# Altium PCB Lab11.PcbDoc
Units mm, origin at the board's own origin, x right, y up, seen from the top; angles counter-clockwise.
Board outline 80 x 35 mm, 4 copper layers (Top Layer, GND, PWR, Bottom Layer), stack 0.603 mm thick; 16 components, 11 nets, 48 pads, 0 vias.
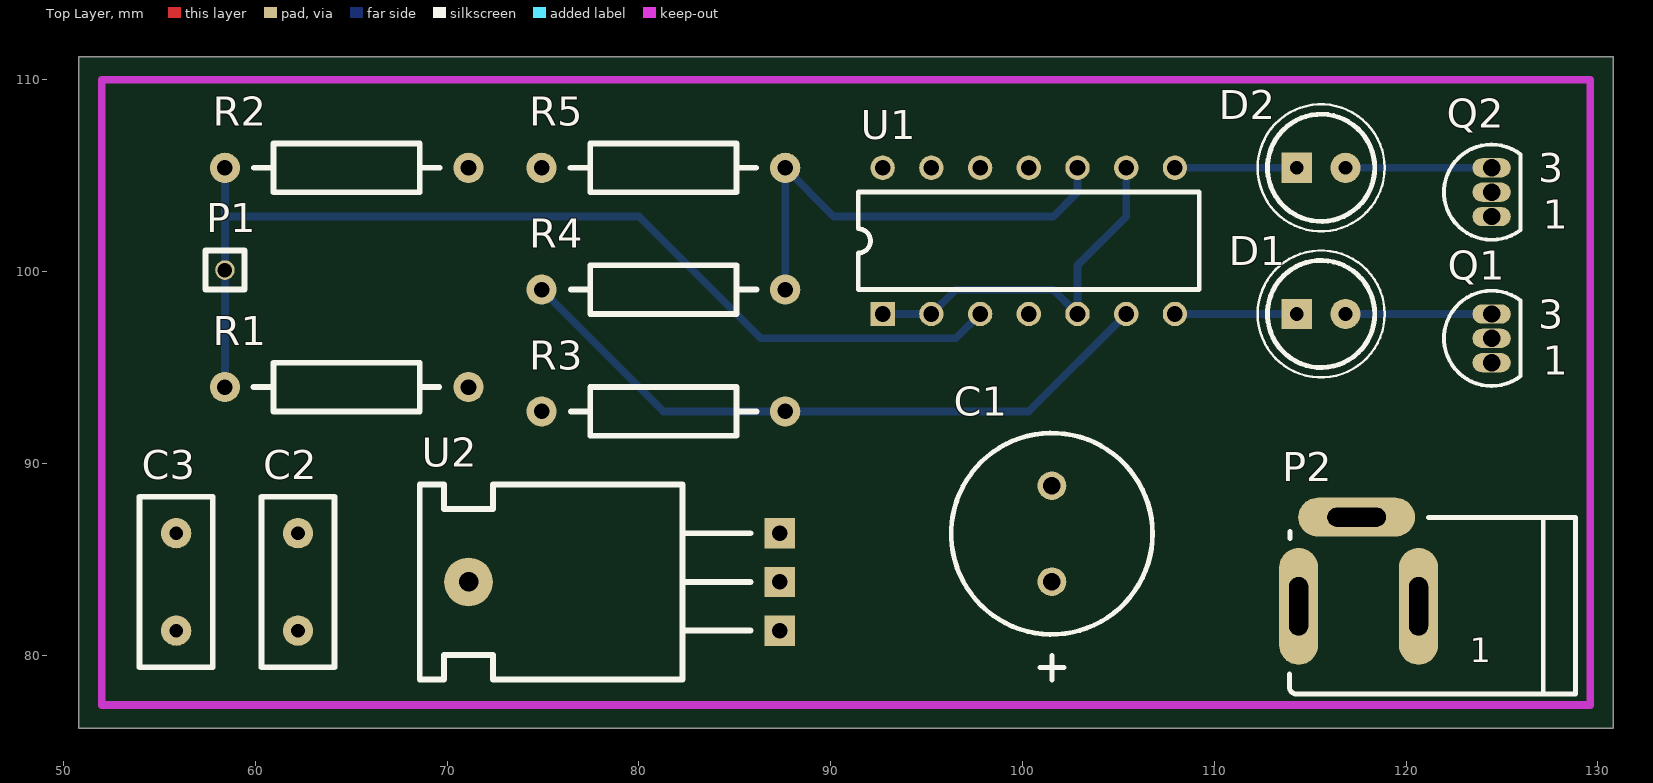
[diagram p0: Top Layer view]
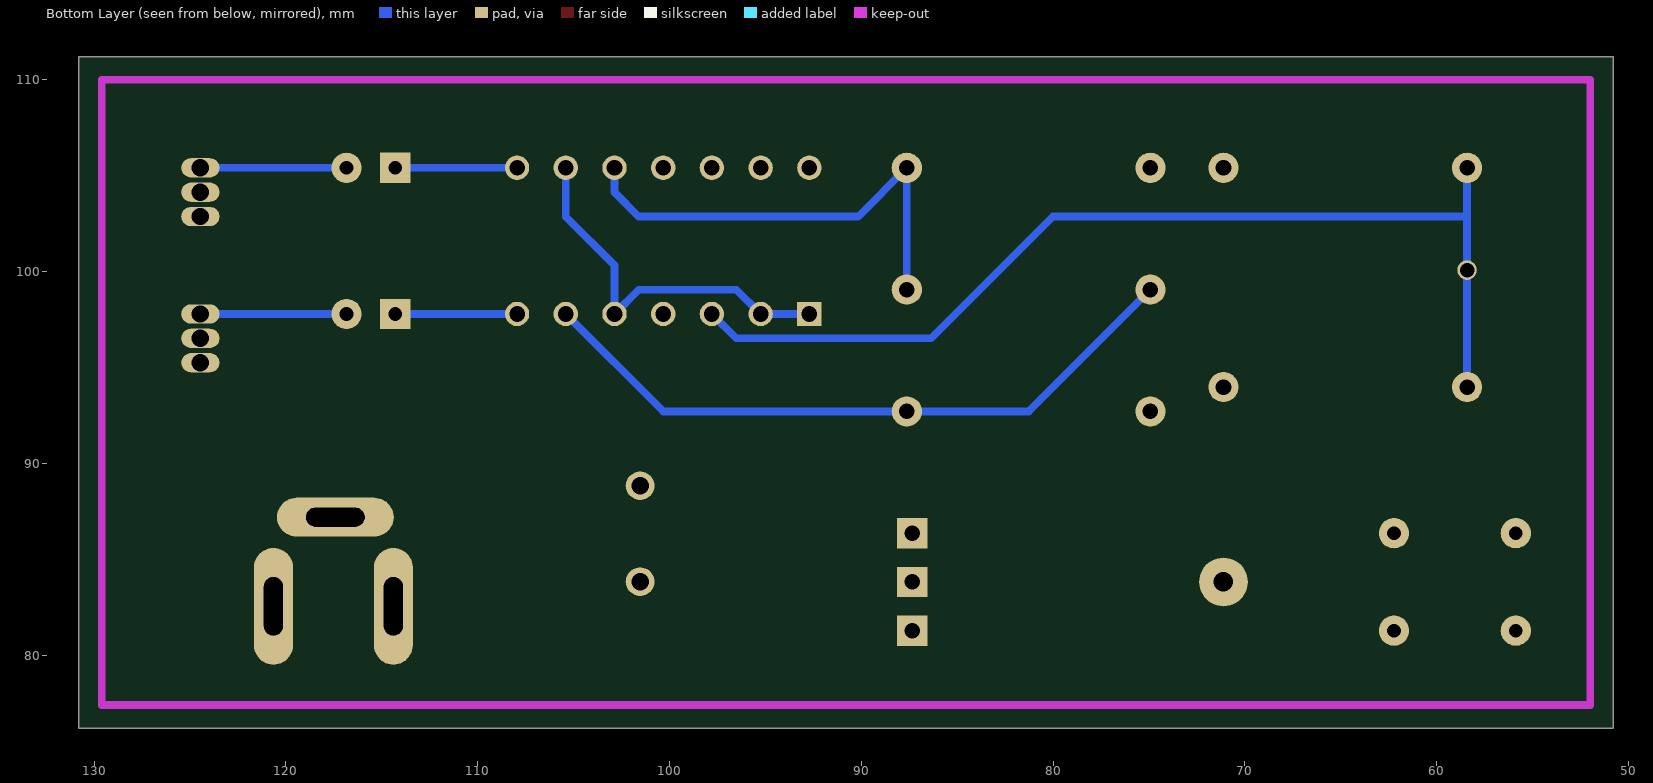
[diagram p1: Bottom Layer view, seen from below]
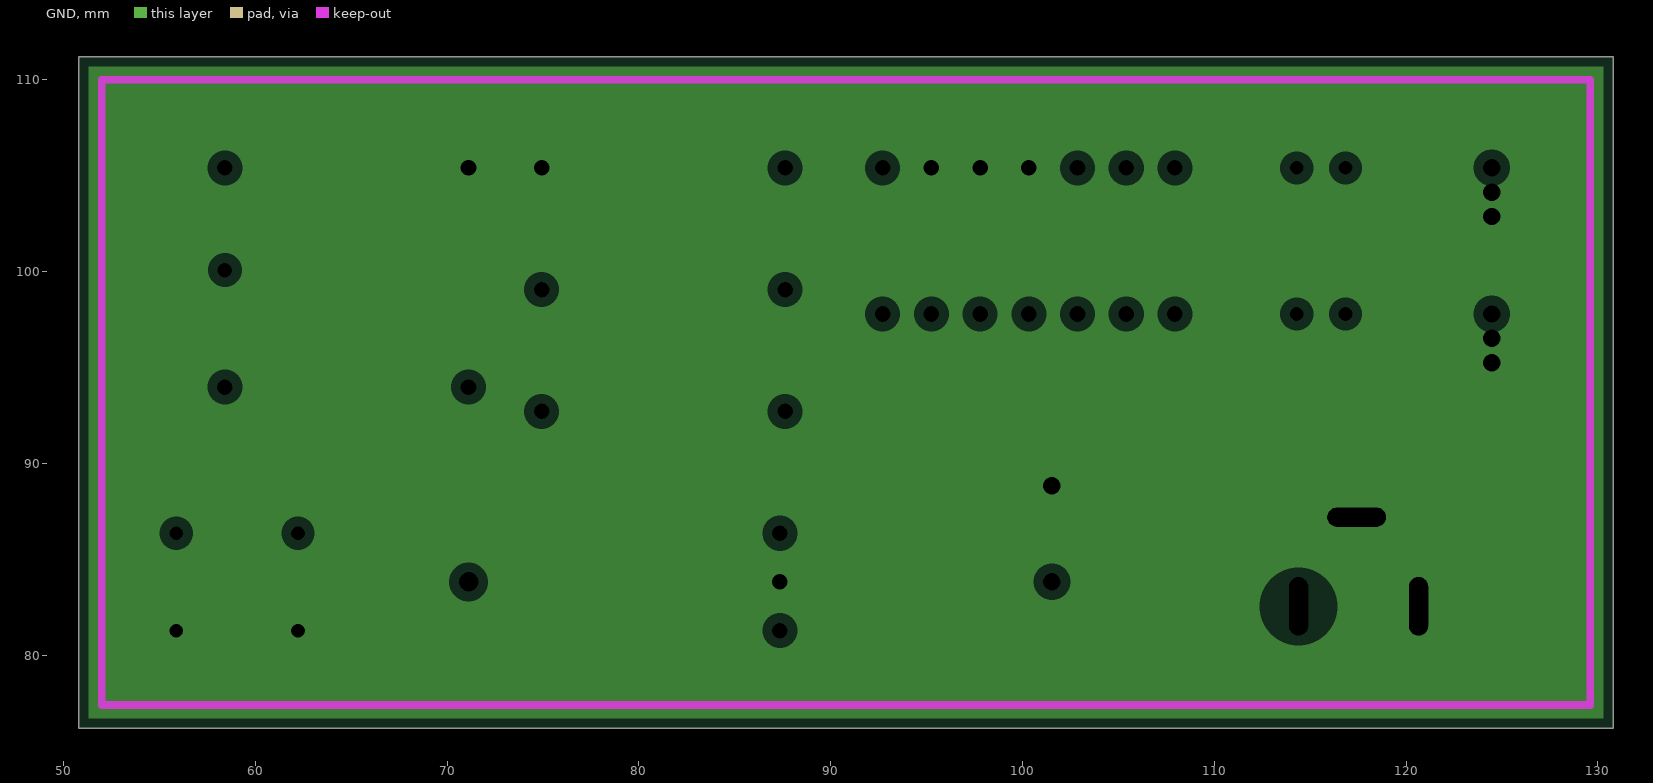
[diagram p2: GND, clearances drawn from the general rule]
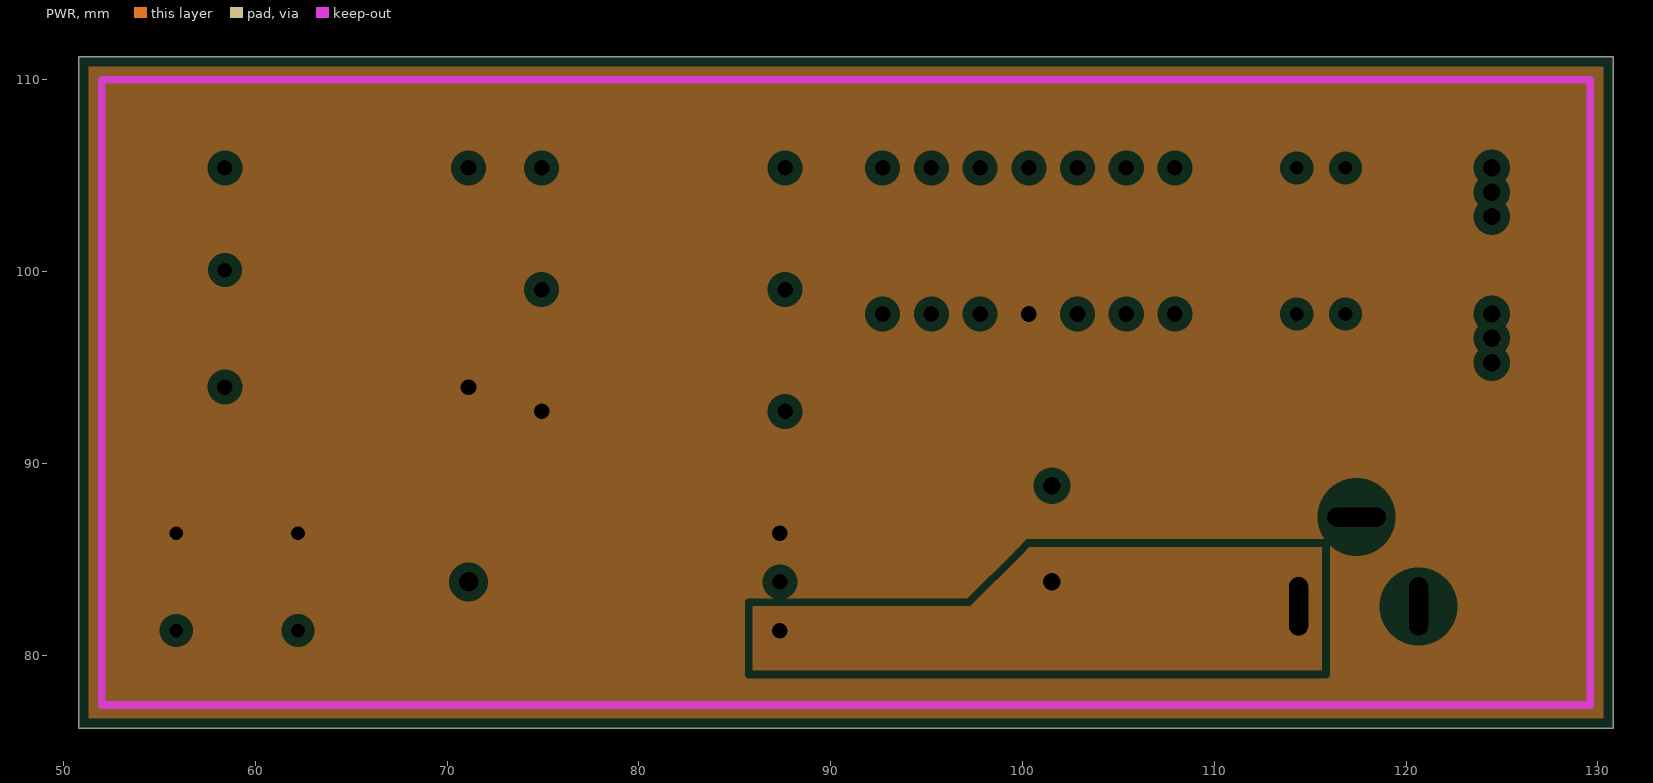
[diagram p3: PWR, clearances drawn from the general rule]
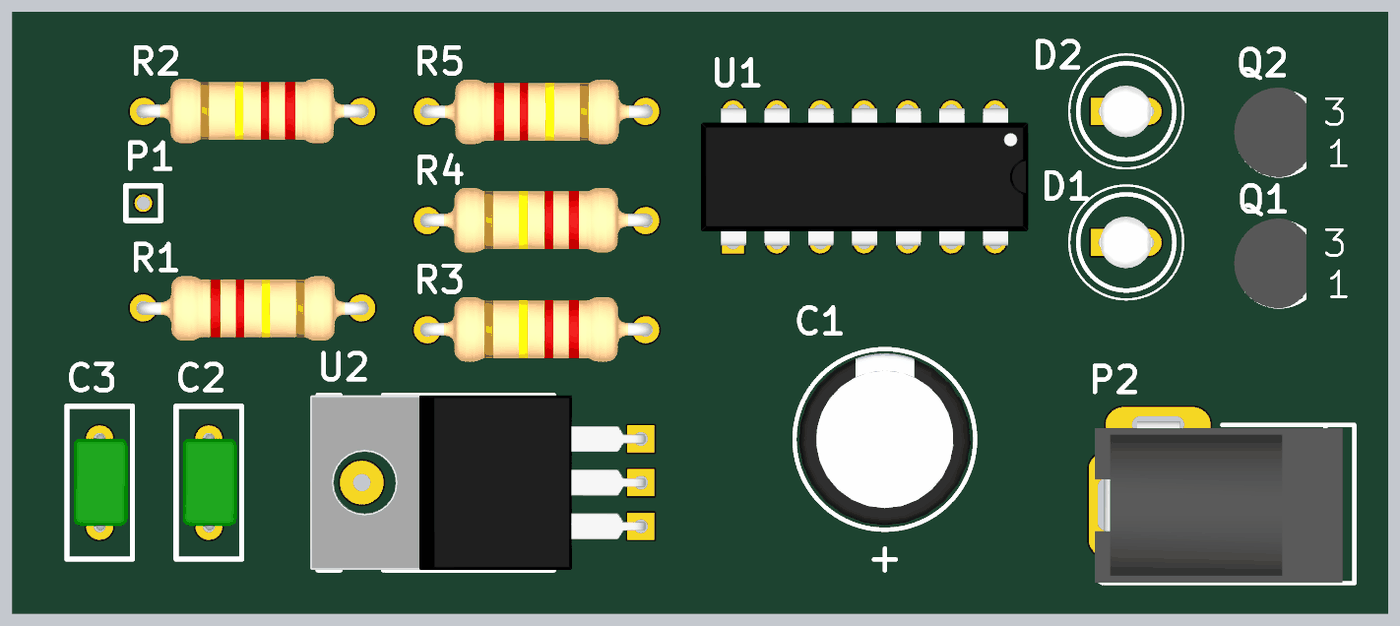
[diagram p4: 3D render of the assembled board from above, using the file's embedded part models]

## Layer stack, top to bottom
Top Solder: solder mask 0.0102, Solder Resist, Dk 3.5
Top Layer: signal copper 0.0356
Dielectric 2: prepreg 0.0711, PP-006, Dk 4.1
GND: plane copper 0.035, net GND
Dielectric 1: dielectric 0.32, FR-4, Dk 4.8
PWR: plane copper 0.035, net +5V
Dielectric 3: prepreg 0.0711, PP-006, Dk 4.1
Bottom Layer: signal copper 0.0356
Bottom Solder: solder mask 0.0102, Solder Resist, Dk 3.5

## Board outline
50.8,76.2 130.8,76.2 130.8,111.2 50.8,111.2

## Design rules (kind name [scope] priority, off if disabled: settings)
Clearance Clearance_1 [All] p1: gap=0.4 ignorepadtopadclearanceinfootprint=TRUE
Clearance Clearance_2 [OnMid vs OnMid] p2: gap=0.254 ignorepadtopadclearanceinfootprint=TRUE
Clearance Clearance_3 [(ExistsOnLayer('Top Layer') Or ExistsOnLayer('Bottom Layer')) vs (ExistsOnLayer('Top Layer') Or ExistsOnLayer('Bottom Layer'))] p3: gap=0.254 ignorepadtopadclearanceinfootprint=TRUE
Clearance [All] p4: gap=0.254 ignorepadtopadclearanceinfootprint=TRUE
HoleSize [All] p1: absolutevalues=TRUE maxlimit=3.5 minlimit=0.9 maxpercent=80.000 minpercent=20.000
PlaneClearance [All] p1: clearance=0.508
PlaneConnect [All] p1: planeconnectstyle=Relief reliefexpansion=0.508 reliefentries=4 reliefconductorwidth=0.254 reliefairgap=0.254
PolygonConnect [All] p1: connectstyle=Relief reliefconductorwidth=0.254 reliefentries=4 polygonreliefangle="90 Angle" airgapwidth=0.254
RoutingCorners [All] p1: cornerstyle=45-Degree minsetback=2.5 maxsetback=2.5
RoutingLayers RoutingLayers_1 [All] p1: top layer_v5=TRUE bottom layer_v5=TRUE
RoutingLayers [All] p2: top layer_v5=TRUE bottom layer_v5=TRUE
RoutingVias RoutingViaStyle_1 [All] p1: holewidth=0.254 width=0.7 viastyle="Through Hole" minholewidth=0.254 minwidth=0.254 maxholewidth=0.254 maxwidth=1
RoutingVias [All] p2: holewidth=0.711 width=1.27 viastyle="Through Hole" minholewidth=0.711 minwidth=1.27 maxholewidth=0.711 maxwidth=1.27
SolderMaskExpansion [All] p1: expansion=0.102 istentingtop=FALSE
Width MaxMinWidth_1 [All] p1: maxlimit=1 minlimit=0.254 preferedwidth=0.4 toplayer_maxwidth=0.254 toplayer_prefwidth=0.254 minimp=50.000000 maximp=50.000000 favimp=50.000000
Width [All] p2: maxlimit=0.254 minlimit=0.254 preferedwidth=0.254
25 further rules are at their usual default settings.

## Components (designator, comment, footprint, x,y, rotation, side; value= is the part's Value field where it differs from the comment)
C1 "10uF" RAD0.2-POL 101.533,83.835 r90 top
C2 "0.33uF" RAD0.2 62.23,86.36 r270 top
C3 "0.1uF" RAD0.2 55.88,86.36 r270 top
D1 "LN265RPH" LN265PH 114.3,97.79 r0 top
D2 "LN365GPH" LN265PH 114.3,105.41 r0 top
P1 "PROBE" PROBE 58.42,100.076 r0 top
P2 "CP-202A-ND" CP-202A-ND 120.65,82.55 r0 top
Q1 "2N5485" TO-92A 124.46,95.25 r0 top
Q2 "2N5485" TO-92A 124.46,102.87 r0 top
R1 "4M7" axial0.5 58.42,93.98 r0 top
R2 "1M5" axial0.5 71.12,105.41 r180 top
R3 "100k" axial0.5 87.63,92.71 r180 top
R4 "68k" axial0.5 87.63,99.06 r180 top
R5 "33k" axial0.5 74.93,105.41 r0 top
U1 "LM324" DIP14 92.71,97.79 r90 top
U2 "LM7805CT(3)" TO-220 87.351,81.28 r90 top

## Footprints (in the part's own frame and the unit in brackets; to place one, negate y for a bottom-side part, rotate by r counter-clockwise, add the part's x,y. Pads: shape width x height; smd on the part's side, far side on the other; paste and mask are expansions set on the pad)
axial0.5 [mil]
  round 62 hole 32: 1(0,0) 2(500,0)
  silkscreen extent 59,-50 440,50, body extent -14,-75 516,73, height 179
CP-202A-ND [mil]
  oval 80x240 hole 39 slot 120 at 90 deg: 1(0,0) 3(-246.06,0)
  oval 240x80 hole 39 slot 120 at 0 deg: 2(-127.06,182.83)
  silkscreen extent -265,-180 322,182, body extent -272,-179 295,191, height 437
DIP14 [mil]
  rect 50x50 hole 32: 1(0,0)
  round 50 hole 32: 2(0,-100) 3(0,-200) 4(0,-300) 5(0,-400) 6(0,-500) 7(0,-600) 8(300,-600) 9(300,-500) 10(300,-400) 11(300,-300) 12(300,-200) 13(300,-100) 14(300,0)
  silkscreen extent 50,-650 250,50, body extent -7,-676 307,74, height 159
LN265PH [mil]
  rect 62x62 hole 28: A(0,0)
  round 62 hole 28: K(100,0)
  silkscreen extent -80,-130 180,130, body extent -11,-59 109,59, height 208
PROBE [mil]
  round 40 hole 30: 1(0,0)
  silkscreen extent -40,-40 40,40, body extent -432,-33 33,33, height 300
RAD0.2 [mil]
  round 62 hole 28: 1(0,0) 2(200,0)
  silkscreen extent -75,-75 275,75, body extent -11,-60 209,65, height 290
RAD0.2-POL [mm] "Capacitor (Radial); 2 Leads"
  round 1.5 hole 0.9: 1(0,0) 2(5,0)
  silkscreen extent -5.12,-5.25 7.75,5.25, body extent -2.5,-5 7.5,5, height 20.35
TO-92A [mm]
  oval 2x1 hole 0.9: 1(0,0) 2(0,1.27) 3(0,2.54)
  silkscreen extent -2.48,-1.21 1.5,3.75, body extent -2.62,-1.29 1.59,3.93, height 5.17
TO-220 [mil]
  round 100 hole 40: 0(100,639)
  rect 62x62 hole 32: 1(0,0) 2(100,0) 3(200,0)
  silkscreen extent -100,60 300,739, body extent -100,-10 300,757, height 172

## Part data
C1 C2 C3: library part "CAPACITOR POL", "Polarized Capacitor"
D1 D2: library part LED, "Light Emitting Diode LED"
P1: "Probe"
P2: "Male Power Jack, PCB"
Q1 Q2: "N-channel JFET"
R1 R2 R3 R4 R5: library part RES1, "Resistor"
U1: "Quad (4) Operational Amplifier"
U2: "Three Terminal Voltage Regulator"

## Nets (pads, with @x,y where several pads share a name; then routed paths per layer and width w, separated by ;. In a path a pad name is that pad's centre, name@x,y a point inside that pad or via, vN(x,y) a via of type N, cw(c..) or ccw(c..) an arc to the next point about the centre after c; other vN are vias at no path point)
+5V: C2.1 C3.1 R1.2 R3.2 U1.4 U2.3
+9V: C1.1 P2.3 U2.1
GND: C1.2 C2.2 C3.2 P2.1 P2.2 Q1.1 Q1.2 Q2.1 Q2.2 R2.1 R5.1 U1.11 U1.12 U1.13 U2.2
HIGH: D1.A U1.7 | length 6.3
  Bottom Layer w0.4: U1.7 D1.A
LOW: D2.A U1.8 | length 6.3
  Bottom Layer w0.4: U1.8 D2.A
NetD1_K: D1.K Q1.3 | length 7.6
  Bottom Layer w0.4: D1.K Q1.3
NetD2_K: D2.K Q2.3 | length 7.6
  Bottom Layer w0.4: D2.K Q2.3
NetP1_1: P1.1 R1.1 R2.2 U1.3 | length 53.7
  Bottom Layer w0.4: R1.1 P1.1 ; P1.1@58.42,100.33 58.42,102.87 ; R2.2 58.42,102.87 ; U1.3 96.52,96.52 86.36,96.52 80.01,102.87 58.42,102.87
NetR3_1: R3.1 R4.2 U1.6 | length 35.2
  Bottom Layer w0.4: R4.2 81.28,92.71 R3.1 100.33,92.71 U1.6
NetR4_1: R4.1 R5.2 U1.10 | length 24.4
  Bottom Layer w0.4: R4.1 R5.2 90.17,102.87 101.6,102.87 102.87,104.14 U1.10
NetU1_1: U1.1 U1.2 U1.5 U1.9 | length 19.9
  Bottom Layer w0.4: U1.1 U1.2 96.52,99.06 101.6,99.06 U1.5 102.87,100.33 105.41,102.87 U1.9
pads on no net: U1.14 U2.0

## Polygon pours and split planes (outlines as drawn)
GND on GND (split plane): 130.29,76.71 51.31,76.71 51.31,110.69 130.29,110.69
+9V on PWR (split plane): 115.622,79.196 85.927,79.196 85.927,82.551 97.206,82.551 97.258,82.558 97.307,82.579 97.348,82.611 99.939,85.201 100.388,85.65 115.622,85.65
+5V on PWR (split plane): 130.29,76.71 51.31,76.71 51.31,110.69 130.29,110.69

## Keep-outs
Keep-Out Layer:
  lines w0.4: 52,77.4 52,110 129.6,110 129.6,77.4 52,77.4

## Other copper
PWR (plane layer: these items are gaps in the copper):
  lines w0.4: 85.725,78.994 115.824,78.994 115.824,85.852 101.854,85.852 101.346,85.852 100.305,85.852 99.797,85.344 97.206,82.753 85.725,82.753 85.725,78.994

## Text inside footprints (layer, text, board x,y; h text height)
P2: Top Overlay "1" at 123.317,79.629 h1.27
Q1: Top Overlay "3" at 126.89,97.03 h1.5; Top Overlay "1" at 127.12,94.62 h1.5
Q2: Top Overlay "3" at 126.89,104.65 h1.5; Top Overlay "1" at 127.12,102.24 h1.5